# Altium PCB PCB1.PcbDoc
Units mm, origin at the board's own origin, x right, y up, seen from the top; angles counter-clockwise.
Board outline 100 x 100 mm, 2 copper layers (Top Layer, Bottom Layer); 43 components, 54 nets, 137 pads, 8 vias.
Unrouted connection lines stored in the file: 25.
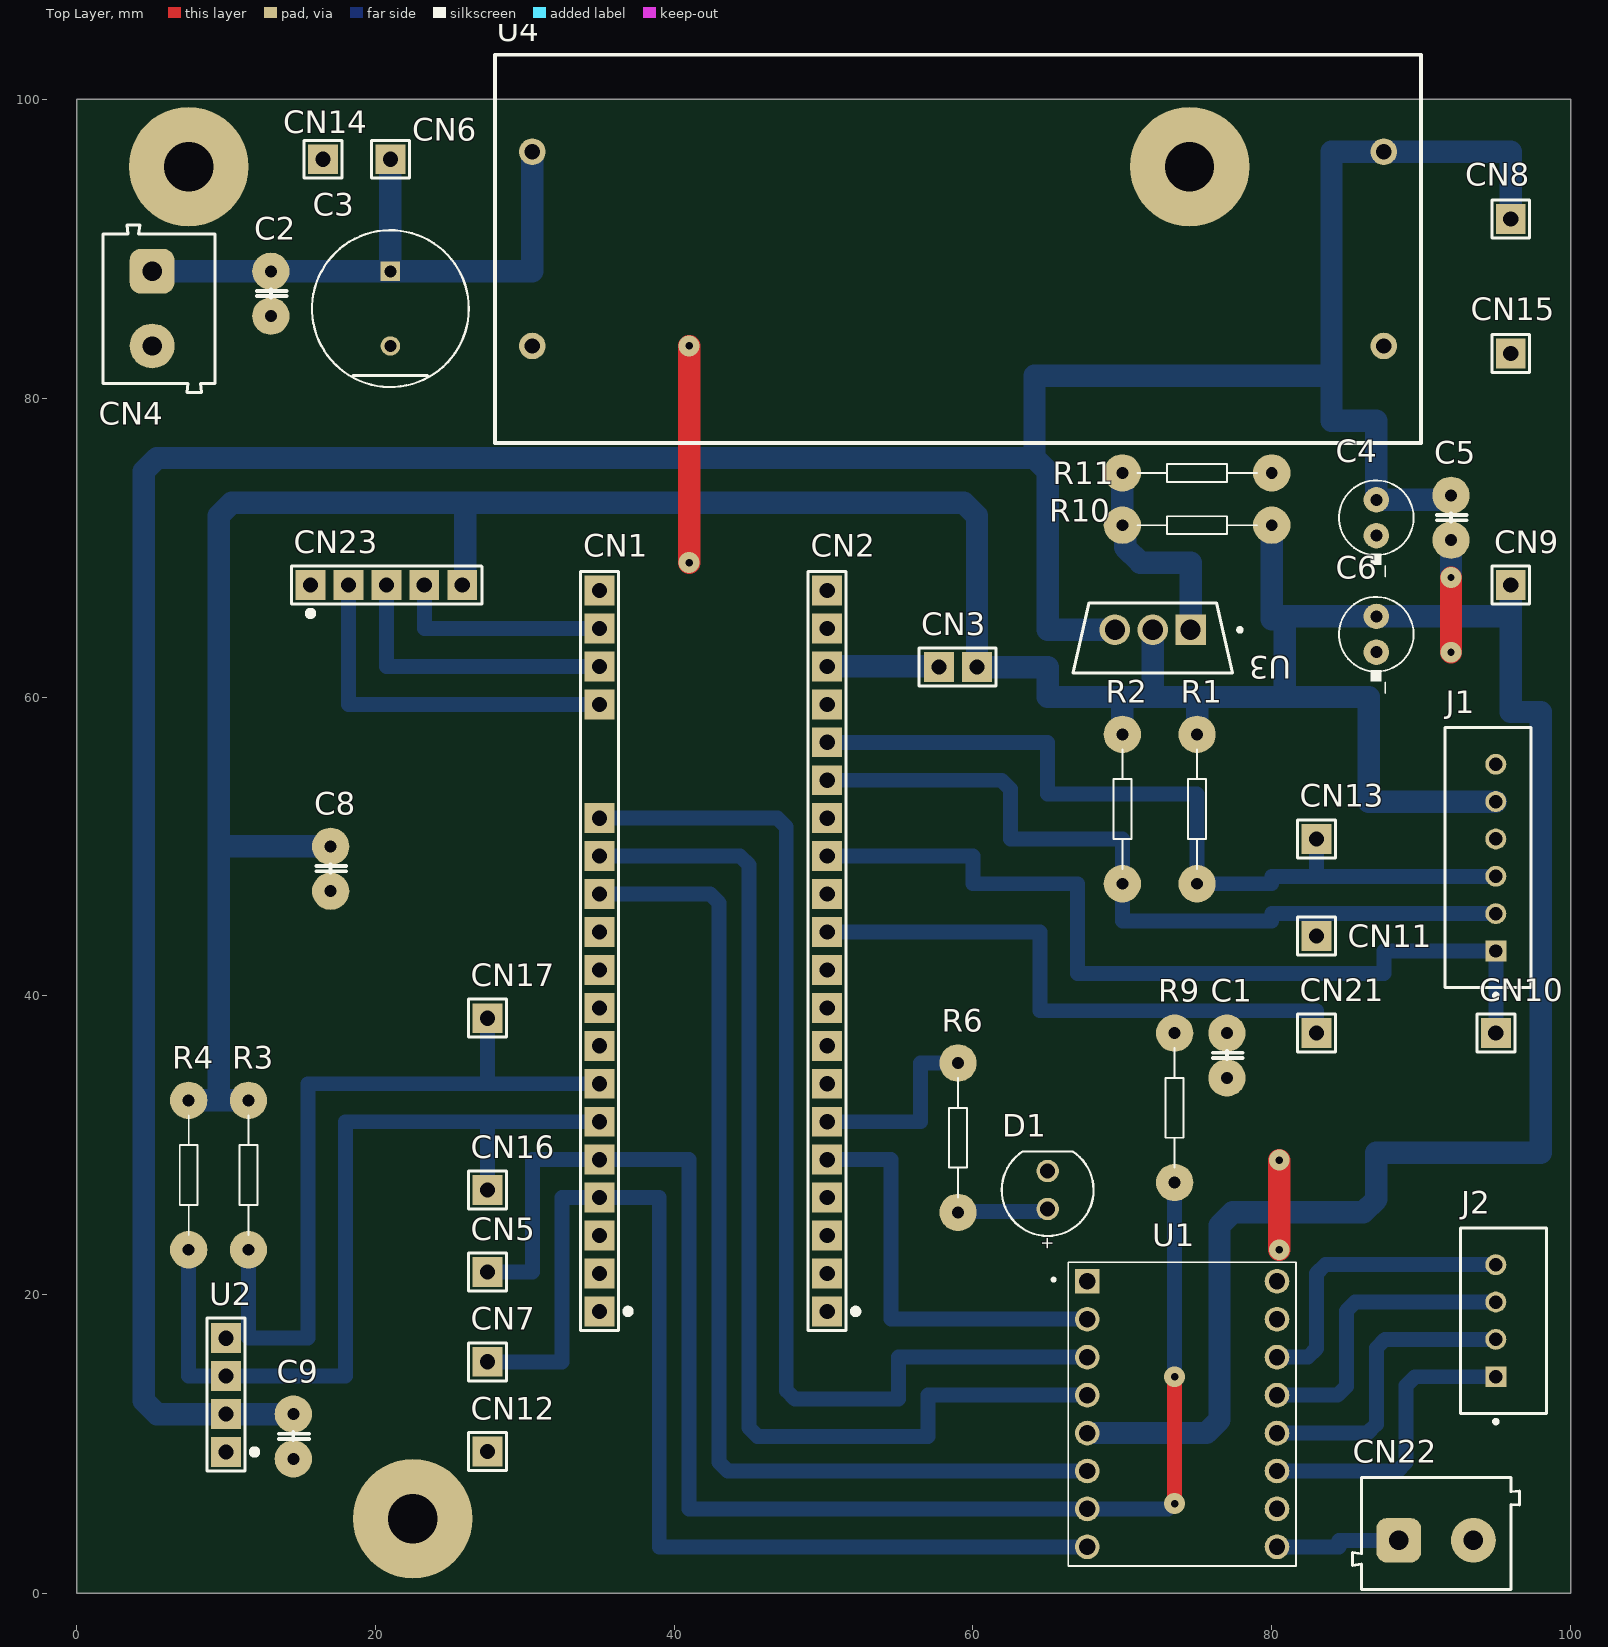
[diagram p0: Top Layer view]
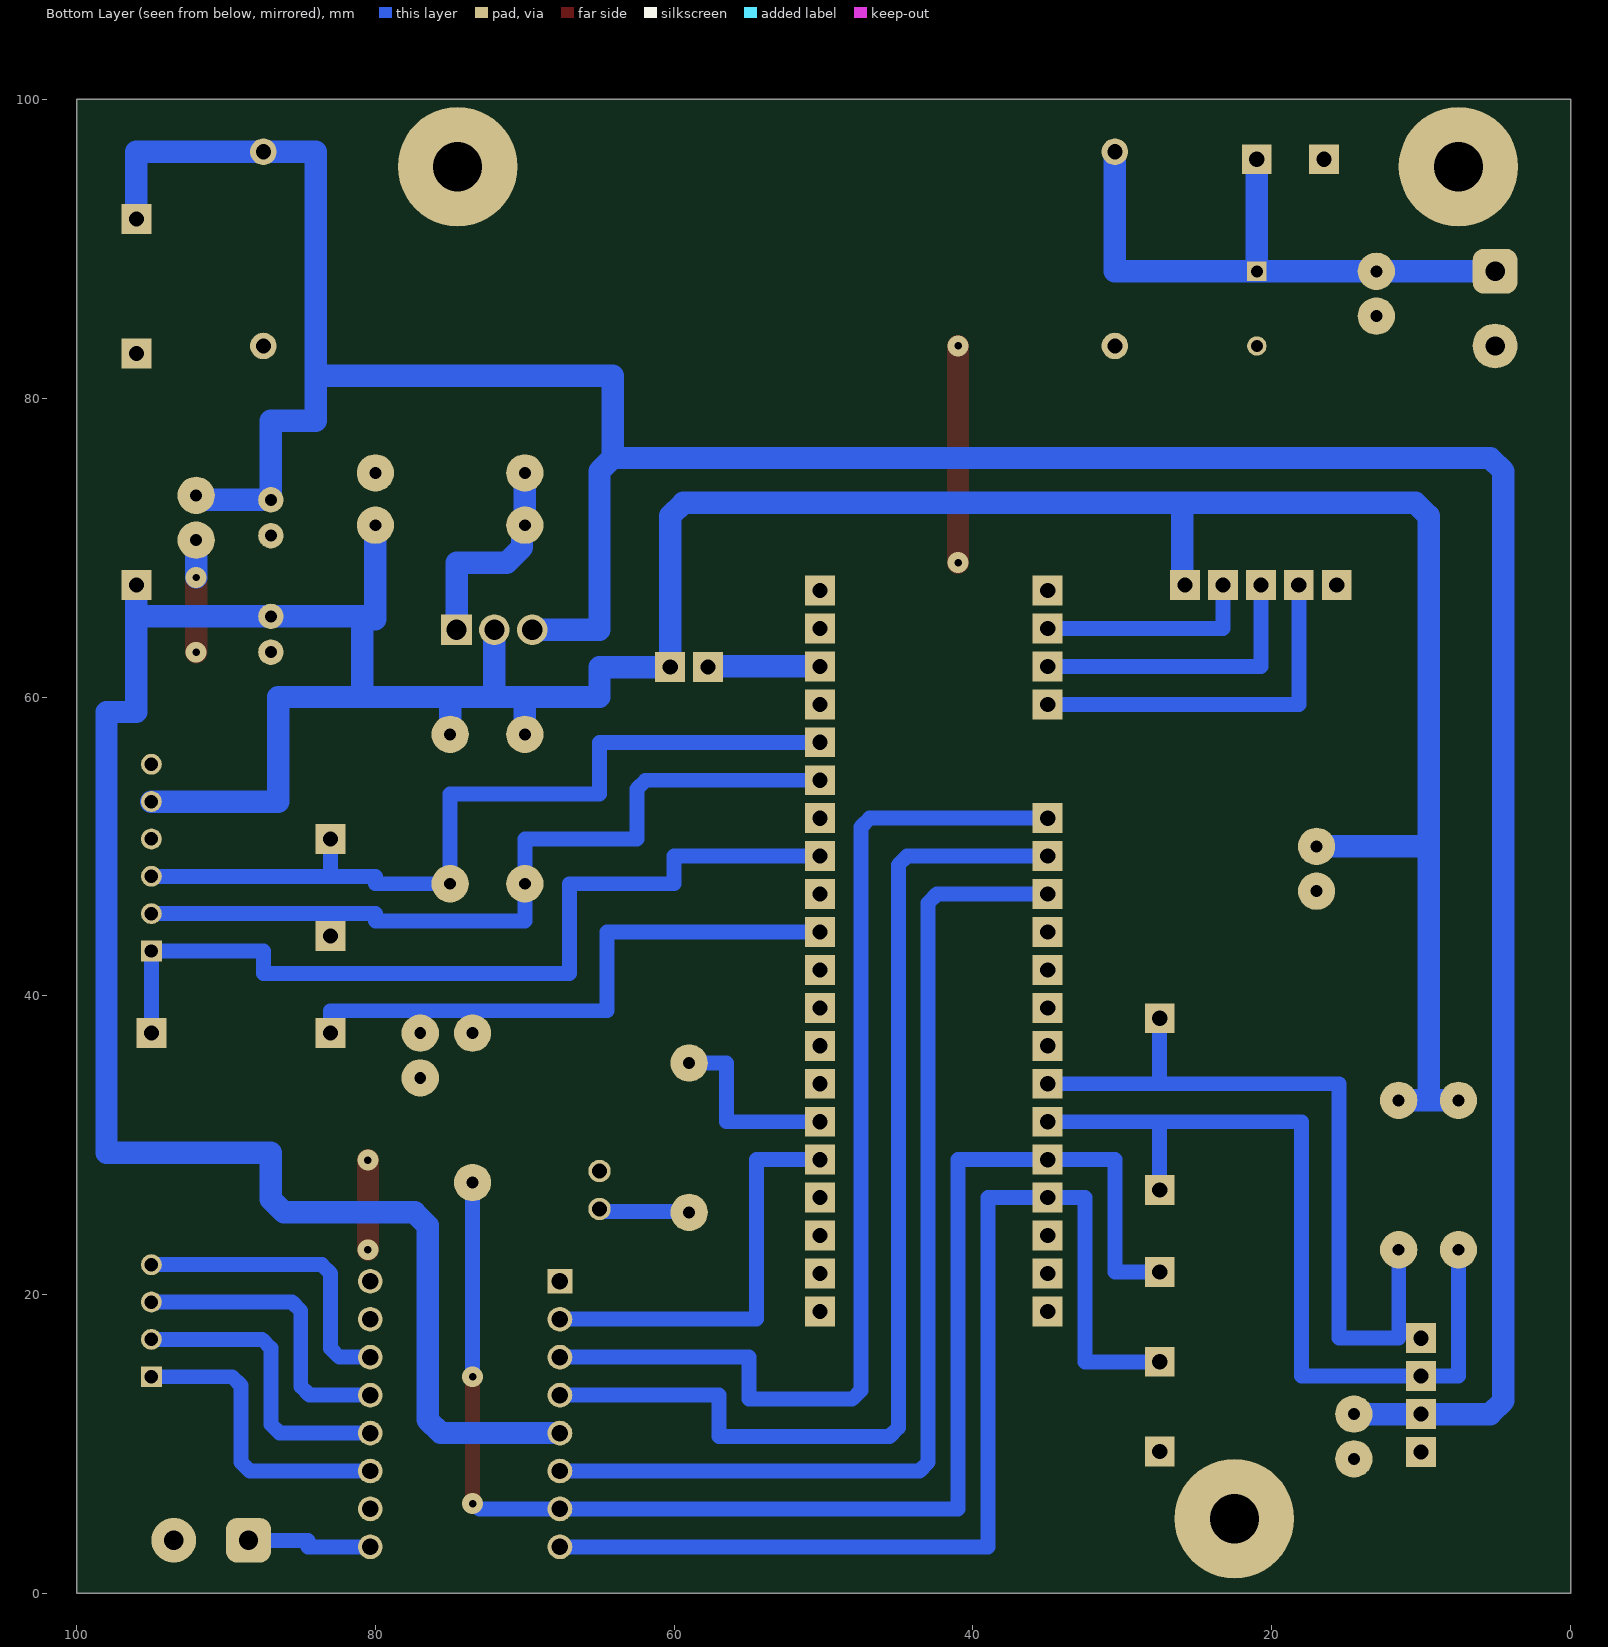
[diagram p1: Bottom Layer view, seen from below]

## Layer stack, top to bottom
Top Solder: solder mask 0.0102, Solder Resist, Dk 3.5
Top Layer: signal copper 0.0356
Dielectric 1: dielectric 0.32, FR-4, Dk 4.8
Bottom Layer: signal copper 0.0356
Bottom Solder: solder mask 0.0102, Solder Resist, Dk 3.5

## Board outline
0,0 0,100 100,100 100,0

## Design rules (kind name [scope] priority, off if disabled: settings)
Clearance Clearance_1 [OnMid vs OnMid] p1: gap=0.4 ignorepadtopadclearanceinfootprint=FALSE sourcerule=36 cellrowname=All cellrowtype=0 cellcolname=All cellcoltype=0 innerlayers=TRUE
Clearance Clearance_2 [(ExistsOnLayer('Top Layer') Or ExistsOnLayer('Bottom Layer')) vs (ExistsOnLayer('Top Layer') Or ExistsOnLayer('Bottom Layer'))] p2: gap=0.4 ignorepadtopadclearanceinfootprint=FALSE sourcerule=36 cellrowname=All cellrowtype=0 cellcolname=All cellcoltype=0 outerlayers=TRUE
Clearance [All] p3: gap=0.254 ignorepadtopadclearanceinfootprint=FALSE ismatrix=TRUE
PolygonConnect [All] p1: connectstyle=Relief reliefconductorwidth=1 reliefentries=4 polygonreliefangle="90 Angle" airgapwidth=0.4
RoutingVias [All] p1: holewidth=0.5 width=1.4 viastyle="Through Hole" minholewidth=0.5 minwidth=1.4 maxholewidth=0.5 maxwidth=1.4
SolderMaskExpansion [All] p1: expansion=0.102 istentingtop=FALSE
Width [All] p1: maxlimit=5 minlimit=0.7 preferedwidth=1 minimp=50.000000 maximp=50.000000 favimp=50.000000
30 further rules are at their usual default settings.

## Classes and differential pairs
component class TestPoints: CN5 CN7 CN9 CN10 CN11 CN12 CN13 CN16 CN17 CN21
component class PowerStage: C4 C5 C6 C8 C9 R10 R11 U3
component class MainCircuit: C1 CN1 CN2 CN3 CN22 CN23 D1 J1 J2 R1 R2 R3 R4 R6 R9 U1 U2

## Components (designator, comment, footprint, x,y, rotation, side; value= is the part's Value field where it differs from the comment)
C1 "C" CAP_AXIAL_0.2MM 77,36 r270 top
C2 "0.1uF" CAP_AXIAL_0.2MM 13,87 r270 top
C3 "100uF" C_RAD_11MM 21,86 r90 top
C4 "100uF" C_RAD_5MM 87,72 r270 top
C5 "0.1uF" CAP_AXIAL_0.2MM 92,72 r270 top
C6 "100uF" C_RAD_5MM 87,64.2 r270 top
C8 "0.1uF" CAP_Axial_0.2mm 17,48.5 r270 top
C9 "0.1uF" CAP_Axial_0.2mm 14.5,10.5 r270 top
CN1 "Header 20x1_Female" "SPECIAL P_FEMALE_LEFT_BLUEPILL" 35,43 r90 top locked
CN2 "Header 20X1_Female" 1*20P_FEMALE 50.24,43 r90 top locked
CN3 "Header 2X1_Male Jumper" "JUMPER 2X1 PIN" 59,62 r180 top
CN4 "CONN_02P" TERMINAL_BLOCK_2_PIN 5.5,86 r270 top
CN5 "Header 1X1_Male" 1*1P_MALE 27.5,21.5 r0 top
CN6 "Header 1X1_Male" 1*1P_MALE 21,96 r0 top
CN7 "Header 1X1_Male" 1*1P_MALE 27.5,15.5 r0 top
CN8 "Header 1X1_Male" 1*1P_MALE 96,92 r0 top
CN9 "Header 1X1_Male" 1*1P_MALE 96,67.5 r0 top
CN10 "Header 1X1_Male" 1*1P_MALE 95,37.5 r90 top
CN11 "Header 1X1_Male" 1*1P_MALE 83,44 r90 top
CN12 "Header 1X1_Male" 1*1P_MALE 27.5,9.5 r90 top
CN13 "Header 1X1_Male" 1*1P_MALE 83,50.5 r90 top
CN14 "Header 1X1_Male" 1*1P_MALE 16.5,96 r90 top
CN15 "Header 1X1_Male" 1*1P_MALE 96,83 r90 top
CN16 "Header 1X1_Male" 1*1P_MALE 27.5,27 r90 top
CN17 "Header 1X1_Male" 1*1P_MALE 27.5,38.5 r90 top
CN21 "Header 1X1_Male" 1*1P_MALE 83,37.5 r90 top
CN22 "CONN_02P" TERMINAL_BLOCK_2_PIN 91,4 r0 top
CN23 "Header 5X1_Female" 1*5P_FEMALE 22,67.5 r0 top
D1 "RED LED" LED_DIODE_3.9MM 65,27 r90 top
J1 "B6B-XH-A(LF)(SN)" "JST 6 PIN CONNECTOR" 94.475,49.25 r90 top
J2 "JST 4 PIN CONNECTOR" "JST 4 PIN CONNECTOR" 95.525,18.25 r270 top
R1 "4k7" RES_AXIAL_3.2_6MM 75,52.5 r90 top
R2 "4k7" RES_AXIAL_3.2_6MM 70,52.5 r90 top
R3 "4k7" RES_AXIAL_3.2_6MM 11.5,28 r90 top
R4 "4k7" RES_AXIAL_3.2_6MM 7.5,28 r90 top
R6 "200" RES_AXIAL_3.2_6MM 59,30.5 r90 top
R9 "R" RES_AXIAL_3.2_6MM 73.5,32.5 r90 top
R10 "121" RES_AXIAL_3.2_6MM 75,71.5 r0 top
R11 "200" RES_AXIAL_3.2_6MM 75,75 r180 top
U1 "DRV8825 STEPPER MOTOR DRIVER" IC_DRV8825_MODULE 74,12 r0 top
U2 "Display LCD 1604 i2c Module" 1*4P_FEMALE 10,15.81 r90 top
U3 "IRU1050" IRU1050 72.035,63.96 r270 top
U4 "STEP_DOWN MODULE" STEP_DOWN_MODULE 59,90 r0 top

## Footprints (in the part's own frame and the unit in brackets; to place one, negate y for a bottom-side part, rotate by r counter-clockwise, add the part's x,y. Pads: shape width x height; smd on the part's side, far side on the other; paste and mask are expansions set on the pad)
1*1P_MALE [mm]
  rect 2x2 hole 1.016: 1(0,0)
  silkscreen extent -1.27,-1.27 1.27,1.27, body extent -1.27,-1.19 1.27,1.3, height 8.54
1*4P_FEMALE [mm]
  rect 2x2 hole 1.016: 1(-6.35,0) 2(-3.81,0) 3(-1.27,0) 4(1.27,0)
  silkscreen extent -7.62,-2.1 2.62,1.27, body extent -7.67,-1.27 2.49,1.27, height 9.2
1*5P_FEMALE [mm]
  rect 2x2 hole 1.016: 1(-6.35,0) 2(-3.81,0) 3(-1.27,0) 4(1.27,0) 5(3.81,0)
  silkscreen extent -7.62,-2.1 5.13,1.27, body extent -7.67,-1.27 5.03,1.32, height 9.2
1*20P_FEMALE [mm]
  rect 2x2 hole 1.016: 1(-24.13,0) 2(-21.59,0) 3(-19.05,0) 4(-16.51,0) 5(-13.97,0) 6(-11.43,0) 7(-8.89,0) 8(-6.35,0) 9(-3.81,0) 10(-1.27,0) 11(1.27,0) 12(3.81,0) 13(6.35,0) 14(8.89,0) 15(11.43,0) 16(13.97,0) 17(16.51,0) 18(19.05,0) 19(21.59,0) 20(24.13,0)
  silkscreen extent -25.4,-2.1 25.4,1.27, body extent -25.65,-1.27 25.65,1.27, height 8.5
C_RAD_5MM [mm]
  round 1.7 hole 0.8: 1(-1.2,0) 2(1.2,0)
  silkscreen extent -2.5,-2.5 3.95,2.5, body extent -2.95,-2.95 3.05,3.05, height 14
C_RAD_11MM [mm]
  rect 1.3x1.3 hole 0.8 paste-2539.97 mask+0: 1(2.5,0)
  round 1.3 hole 0.8 paste-2539.97 mask+0: 2(-2.5,0)
  silkscreen extent -5.25,-5.25 5.25,5.25, body extent -5.35,-5.35 5.35,5.35, height 0.25
CAP_AXIAL_0.2MM [mm]
  round 2.5 hole 0.8: 1(-1.5,0) 2(1.5,0)
  silkscreen extent -0.3,-0.95 0.25,1.05, body extent -1.85,-1.25 2.85,1.25, height 8.35
CAP_Axial_0.2mm [mm]
  round 2.5 hole 0.8: 1(-1.5,0) 2(1.5,0)
  silkscreen extent -0.3,-0.95 0.25,1.05, body extent -1.85,-1.25 2.85,1.25, height 8.35
IC_DRV8825_MODULE [mm]
  rect 1.65x1.65 hole 1.1: 1(-6.35,8.89)
  round 1.65 hole 1.1: 2(-6.35,6.35) 3(-6.35,3.81) 4(-6.35,1.27) 5(-6.35,-1.27) 6(-6.35,-3.81) 7(-6.35,-6.35) 8(-6.35,-8.89) 9(6.35,-8.89) 10(6.35,-6.35) 11(6.35,-3.81) 12(6.35,-1.27) 13(6.35,1.27) 14(6.35,3.81) 15(6.35,6.35) 16(6.35,8.89)
  silkscreen extent -8.7,-10.16 7.62,10.16, body extent -7.62,-10.41 7.62,10.41, height 15.04
IRU1050 [mm]
  rect 2.05x2.05 hole 1.35 paste-2539.97 mask+0: 1(-0.54,2.535)
  round 2.05 hole 1.35 paste-2539.97 mask+0: 2(-0.54,0) 3(-0.54,-2.535)
  silkscreen extent -2.35,-5.34 2.35,5.96, body extent -2.45,-5.44 2.45,5.44, height 0.25
"JST 4 PIN CONNECTOR" [mm] "JST 4 PIN CONNECTOR"
  rect 1.4x1.4 hole 0.9 paste-2539.97 mask+0: 1(3.75,-0.525)
  round 1.4 hole 0.9 paste-2539.97 mask+0: 2(1.25,-0.525) 3(-1.25,-0.525) 4(-3.75,-0.525)
  silkscreen extent -6.2,-2.88 6.87,2.88, body extent -6.3,-2.98 6.3,2.98, height 0.25
"JST 6 PIN CONNECTOR" [mm]
  rect 1.4x1.4 hole 0.9 paste-2539.97 mask+0: 1(-6.25,-0.525)
  round 1.4 hole 0.9 paste-2539.97 mask+0: 2(-3.75,-0.525) 3(-1.25,-0.525) 4(1.25,-0.525) 5(3.75,-0.525) 6(6.25,-0.525)
  silkscreen extent -9.35,-2.88 8.7,2.88, body extent -8.8,-2.98 8.8,2.98, height 0.25
"JUMPER 2X1 PIN" [mm]
  rect 2x2 hole 1.016: 1(-1.27,0) 2(1.27,0)
  silkscreen extent -2.54,-1.27 2.6,1.27, body extent -2.54,-1.19 2.54,1.3, height 8.54
LED_DIODE_3.9MM [mm] "THT Mono-color Round Color LED, 2-leads"
  round 1.5 hole 1: A(-1.27,0) K(1.27,0)
  silkscreen extent -3.07,-3.07 2.58,3.08, body extent -2.95,-2.95 2.45,2.95, height 9.2
RES_AXIAL_3.2_6MM [mm] "Resistor 1/8 W L=3.2mm W=6mm"
  round 2.5 hole 0.8: 1(-5,0) 2(5,0)
  silkscreen extent -4,-0.6 4,0.6, body extent -5.23,-1 5.22,1, height 2.5
"SPECIAL P_FEMALE_LEFT_BLUEPILL" [mm]
  rect 2x2 hole 1.016: 1(-24.13,0) 2(-21.59,0) 3(-19.05,0) 4(-16.51,0) 5(-13.97,0) 6(-11.43,0) 7(-8.89,0) 8(-6.35,0) 9(-3.81,0) 10(-1.27,0) 11(1.27,0) 12(3.81,0) 13(6.35,0) 14(8.89,0) 17(16.51,0) 18(19.05,0) 19(21.59,0) 20(24.13,0)
  silkscreen extent -25.4,-2.1 25.4,1.27, body extent -25.65,-1.27 25.65,1.27, height 8.5
STEP_DOWN_MODULE [mil]
  round 70 hole 40: 1(-1122.05,255.91) 2(-1122.05,-255.91) 3(1122.05,255.91) 4(1122.05,-255.91)
  silkscreen extent -1220,-512 1220,512, body extent -1172,-417 1172,378, height 793
TERMINAL_BLOCK_2_PIN [mm] "5,00mm - modular - blue - Horizontal entry with pressure clamp - 9,9 mm height - 02p"
  rrect50% 3x3 hole 1.3: 1(-2.5,-0.45)
  round 3 hole 1.3: 2(2.5,-0.45)
  silkscreen extent -5.6,-3.75 5.6,3.75, body extent -5.6,-3.75 5.6,3.75, height 9.96

## Part data
C1 C2 C5 C8 C9: library part CAP_NP, "Non-Polarized Capacitor"
C3 C4 C6: library part Cap_Pol, "Polarized Capacitor"
CN1: "Header, 16-Pin, Single row,female"
CN2: library part "Header 20x1_Female", "Header, 16-Pin, Single row,female"
CN3: library part "Jumper 2 Pin", "Header, 2-Pin, Single row,male", LatestRevisionDate=17-Jul-2002, LatestRevisionNote="Re-released for DXP Platform.", Publisher="Altium Limited"
CN4 CN22: "Connector Generic 2 Vias"
CN5 CN6 CN7 CN8 CN9 CN10 CN11 CN12 CN13 CN14 CN15 CN16 CN17 CN21: "Header, 1-Pin, Single row,male", LatestRevisionDate=17-Jul-2002, LatestRevisionNote="Re-released for DXP Platform.", Publisher="Altium Limited"
CN23: "Header, 5-Pin, Single row,female", LatestRevisionDate=17-Jul-2002, LatestRevisionNote="Re-released for DXP Platform.", Publisher="Altium Limited"
D1: library part LED, "LED"
J1: library part "JST 6 PIN", "CONN HEADER VERT 6POS 2.5MM"
J2: library part "JST 4 PIN", "CONN HEADER VERT 4POS 2.5MM", Color=Natural, Contact Resistance=20mR, Current Rating=3A, Flammability Rating="UL94 V-0", Housing Color=White, Insulation Resistance=1GR, Max Operating Temperature=85°C, Max Voltage Rating (AC)=250V, Min Operating Temperature=-25°C, Package Quantity=500, Connector Type=Header, Contact Finish - Mating=TIN, Contact Material=Brass, Contact Plating=Tin, Contact Shape=Square, Contact Type="Male Pin", Depth=5.75mm, Fastening Type=Detent, Gender=Male, Housing Material=Polyamide, Insulation Color=Natural, Insulation Material=Nylon, Lead Free="Lead Free", Lead Pitch=2.5mm, Length=12.4mm, Mated Stacking Heights=9.8mm, Material=Polyamide, Max Current Rating=3A, Max Voltage Rating (DC)=250V, Mount="Through Hole", Number of Contacts=4, Number of Positions=4, Number of Rows=1, Orientation=Straight, Packaging=Bulk, Pitch=2.5mm, REACH SVHC="No SVHC", Series=XH, Termination=Solder, Voltage Rating=250V, Voltage Rating (AC)=250V, Wire/Cable Gauge=22AWG
R1 R2 R3 R4 R6 R9 R10 R11: library part RES, "Through-hole Resistor"
U1: library part "DRV8825 Module", "DRV8825 STEPPER MOTOR DRIVER ,Stepper, Bipolar 8.2 ~ 45VDC Supply 1.5A 8.2 ~ 45V Load"
U3: "5A  LOW DROPOUT POSITIVEADJUSTABLE REGULATOR"
U4: library part STEP_DOWN_MODULE

## Free pads (board coordinates)
  round 8 hole 3.3: x(7.5,95.5) x(22.5,5) x(74.5,95.5)

## Via types
v1: diameter 1.4, hole 0.5, Top Layer to Bottom Layer, 8 vias

## Nets (pads, with @x,y where several pads share a name; then routed paths per layer and width w, separated by ;. In a path a pad name is that pad's centre, name@x,y a point inside that pad or via, vN(x,y) a via of type N, cw(c..) or ccw(c..) an arc to the next point about the centre after c; other vN are vias at no path point)
3V3: CN2.18 CN3.2 | length 7.5
  Bottom Layer w1.5: CN2.18 57.73,62.05 CN3.2
3V3D: CN1.1
5V: CN1.3
+3V3: C6.1 C8.1 CN3.1 CN9.1 CN23.5 J1.5 R1.2 R2.2 R3.2 R4.2 R10.2 U1.5 U3.2 | length 286.4
  Bottom Layer w1.5: R4.2 9.5,33 ; R3.2 9.5,33 ; C8.1 9.5,50 ; CN23.5 26,67.5 26,73 ; U1.5 75.621,10.73 76.5,11.609 76.5,24.621 77.379,25.5 86.121,25.5 87,26.379 87,29.5 98,29.5 98,59 96,59 96,65.4 ; R2.2 70,60 ; U3.2 72.035,60 ; R1.2 75,60 ; R10.2 80,65.2 80.879,65.2 ; J1.5 86.5,53 86.5,60 80.879,60 ; CN9.1 96,65.4 ; 9.5,33 9.5,50 ; 9.5,50 9.5,72.121 10.379,73 26,73 ; 26,73 59.391,73 60.27,72.121 CN3.1 65,62 65,60 70,60 ; 70,60 72.035,60 ; 72.035,60 75,60 ; 75,60 80.879,60 ; 80.879,60 80.879,65.2 ; 80.879,65.2 80.879,65.4 C6.1 96,65.4
+5: C4.1 C5.1 C9.1 CN8.1 U2.2 U3.3 U4.3 | length 222.4
  Bottom Layer w1.5: C9.1 U2.2 5.379,12 4.5,12.879 4.5,75.121 5.379,76 64.121,76 ; U3.3 65,64.5 65,75.121 64.121,76 ; C5.1 92,73.2 C4.1 87,78.5 84,78.5 84,81.5 ; CN8.1 96,96.5 U4.3 84,96.5 84,81.5 ; 64.121,76 64.121,81.5 84,81.5
+12: C2.1 C3.1 CN4.1 CN6.1 U4.1 | length 41
  Bottom Layer w1.5: CN4.1 C2.1 C3.1 ; CN6.1 C3.1 ; U4.1 30.5,88.5 C3.1
GND: C1.2 C2.2 C3.2 C4.2 C5.2 C6.2 C8.2 C9.2 CN1.2 CN2.19 CN4.2 CN12.1 CN14.1 CN15.1 CN22.2 CN23.1 D1.K J1.6 R11.1 U1.10 U1.16 U2.1 U4.2 U4.4 | length 28
  Top Layer w1.5: v1(41,69) v1(41,83.5) ; v1(80.5,23) v1(80.5,29) ; v1(92,63) v1(92,68)
  Bottom Layer w1.5: v1(92,68) C5.2
I2C_ENCO_DIR: CN2.13 CN10.1 J1.1 | length 59.8
  Bottom Layer w1: CN2.13@50.24,49.5 CN2.13 60,49.35 60,47.5 67,47.5 67,41.5 87.5,41.5 87.5,43 J1.1 CN10.1
I2C_ENCO_SCL: CN2.15 CN11.1 J1.2 R2.1 | length 55.8
  Bottom Layer w1: CN2.15 61.914,54.43 62.5,53.844 62.5,50.5 70,50.5 R2.1 70,45 80,45 80,45.5 83,45.5 ; CN11.1 83,45.5 ; J1.2 83,45.5
I2C_ENCO_SDA: CN2.16 CN13.1 J1.3 R1.1 | length 57.2
  Bottom Layer w1: CN2.16 65,56.97 65,53.5 75,53.5 R1.1 80,47.5 80,48 83,48 ; CN13.1 83,48 ; J1.3 83,48
I2C_LCD_SCL: CN1.7 CN17.1 R3.1 U2.4 | length 50.8
  Bottom Layer w1: R3.1 11.5,17.08 15.5,17.08 15.5,34.11 27.5,34.11 ; CN17.1 27.5,34.11 ; CN1.7 27.5,34.11
I2C_LCD_SDA: CN1.6 CN16.1 R4.1 U2.3 | length 57.6
  Bottom Layer w1: R4.1 7.5,14.54 U2.3 18,14.54 18,31.57 27.5,31.57 ; CN16.1 27.5,31.57 ; CN1.6 27.5,31.57
NetC7_1: 
NetC7_2: 
NetCN22_1: CN22.1 U1.9 | length 8.6
  Bottom Layer w1: U1.9 84.5,3.11 84.5,3.55 CN22.1
NetD1_A: D1.A R6.1 | length 6
  Bottom Layer w1: R6.1@59,25.569 D1.A@65,25.569
NetJ3_1: 
NetJ3_2: 
NetJ3_3: 
NetJ3_4: 
NetR10_1: R10.1 R11.2 U3.1 | length 14.4
  Bottom Layer w1.5: R11.2 R10.1 70.191,71.309 70.191,70.016 71.207,69 74.57,69 U3.1
NRST: CN2.17
PA0: CN2.5 U1.2 | length 28.1
  Bottom Layer w1: CN2.5 54.5,29.03 54.5,18.35 U1.2
PA1: CN2.6 R6.2 | length 12.7
  Bottom Layer w1: CN2.6 56.5,31.57 56.5,35.5 R6.2
PA2: CN2.7
PA3: CN2.8
PA4: CN2.9
PA5: CN2.10
PA7: CN2.12
PA8: 
PA9: 
PA10: CN1.14 U1.3 | length 73.7
  Bottom Layer w1: CN1.14 46.914,51.89 47.5,51.304 47.5,13.586 48.086,13 55,13 55,15.81 U1.3
PA11: CN1.13 U1.4 | length 73.6
  Bottom Layer w1: CN1.13 44.414,49.35 45,48.764 45,11.086 45.586,10.5 57,10.5 57,13.27 U1.4
PA12: CN1.12 U1.6 | length 70.6
  Bottom Layer w1: CN1.12 42.414,46.81 43,46.224 43,8.776 43.586,8.19 U1.6
PA15: CN1.11
PB1: CN2.14
PB3: CN1.10
PB4: CN1.9
PB5: CN1.8
PB8: CN1.5 CN5.1 R9.1 U1.7 | length 98.6
  Top Layer w1: v1(73.5,6) v1(73.5,14.5)
  Bottom Layer w1: CN5.1 30.5,21.5 30.5,29.03 CN1.5 41,29.03 41,5.65 73.042,5.65 73.392,6 v1(73.5,6) ; v1(73.5,14.5) R9.1
PB9: CN1.4 CN7.1 U1.8 | length 74.5
  Bottom Layer w1: CN7.1 32.5,15.5 32.5,26.49 CN1.4 35,26.5 39,26.5 39,3.11 U1.8
PB12: CN1.20
PB13: CN1.19 CN23.4 | length 14.6
  Bottom Layer w1: CN23.4 23.27,64.59 CN1.19
PB14: CN1.18 CN23.3 | length 19.7
  Bottom Layer w1: CN23.3 20.73,62.05 CN1.18
PB15: CN1.17 CN23.2 | length 24.8
  Bottom Layer w1: CN23.2 18.19,59.51 CN1.17
PC13: CN2.2
PC14: CN2.3
PC15: CN2.4
PWM_ADC6: C1.1 CN2.11 CN21.1 R9.2 | length 39.5
  Bottom Layer w1: CN2.11 64.5,44.27 64.5,39 83,39 CN21.1
STEP_A1: J2.3 U1.13 | length 20.2
  Bottom Layer w1: U1.13 84.414,13.27 85,13.856 85,18.914 85.586,19.5 J2.3
STEP_A2: J2.4 U1.14 | length 20.2
  Bottom Layer w1: U1.14 82.414,15.81 83,16.396 83,21.414 83.586,22 J2.4
STEP_B1: J2.2 U1.12 | length 20.2
  Bottom Layer w1: U1.12 86.414,10.73 87,11.316 87,16.414 87.586,17 J2.2
STEP_B2: J2.1 U1.11 | length 20.3
  Bottom Layer w1: U1.11 88.414,8.19 89,8.776 89,13.914 89.586,14.5 J2.1
VBAT: CN2.1
pads on no net: CN2.20 J1.4 U1.1 U1.15

## Other copper
Bottom Layer:
  pour cut-out: 79,42.5 79,38.5 84,38.5 84,42.5
  pour cut-out: 28.4,27.9 31,27.9 31,30.5 28.4,30.5 28.4,29.808
  pour cut-out: 5.5,23 5.5,13 17.5,13 17.5,23
  pour cut-out: 31,20.5 32,20.5 32,21.908 31,21.908 31,22.408
  pour cut-out: 33,22 38.092,22 38.092,25.5 33,25.5
  pour cut-out: 46.914,52.798 50.5,52.798 50.5,49.5 47,49.5
  pour cut-out: 92.5,21.5 96.1,21.5 96.1,13.5 92.5,13.5
  pour cut-out: 95,54 97,54 97,36 95,36

## Silkscreen, mask and mechanical layers (free items; w line width, h text height)
Board:
  the board outline again, w1

## Text inside footprints (layer, text, board x,y; h text height)
D1: Top Overlay "+" at 65.33,22.95 h0.8 r90